# Altium PCB uMultimeter_ExpIO_Pcb.PcbDoc
Units mil, origin at the board's own origin, x right, y up, seen from the top; angles counter-clockwise.
Board outline 500 x 1200 mil, 2 copper layers (Top Layer, Bottom Layer); 5 components, 14 nets, 50 pads, 2 vias.
Unrouted connection lines stored in the file: 1.
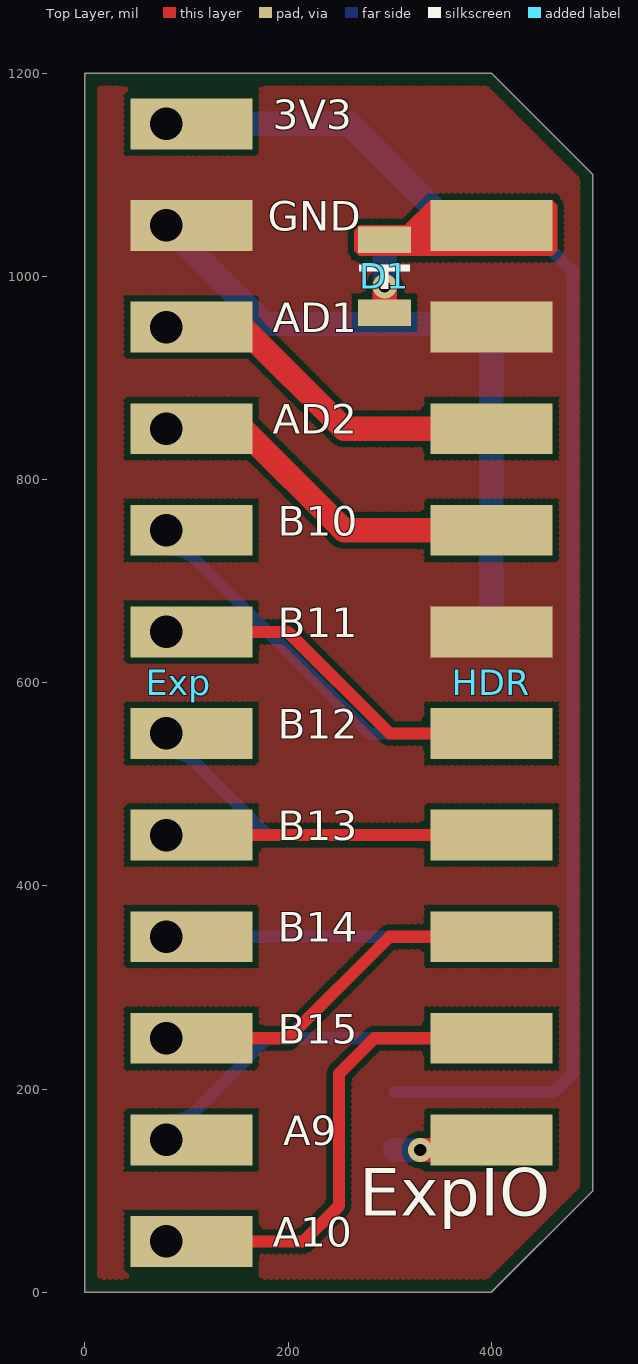
[diagram p0: Top Layer view]
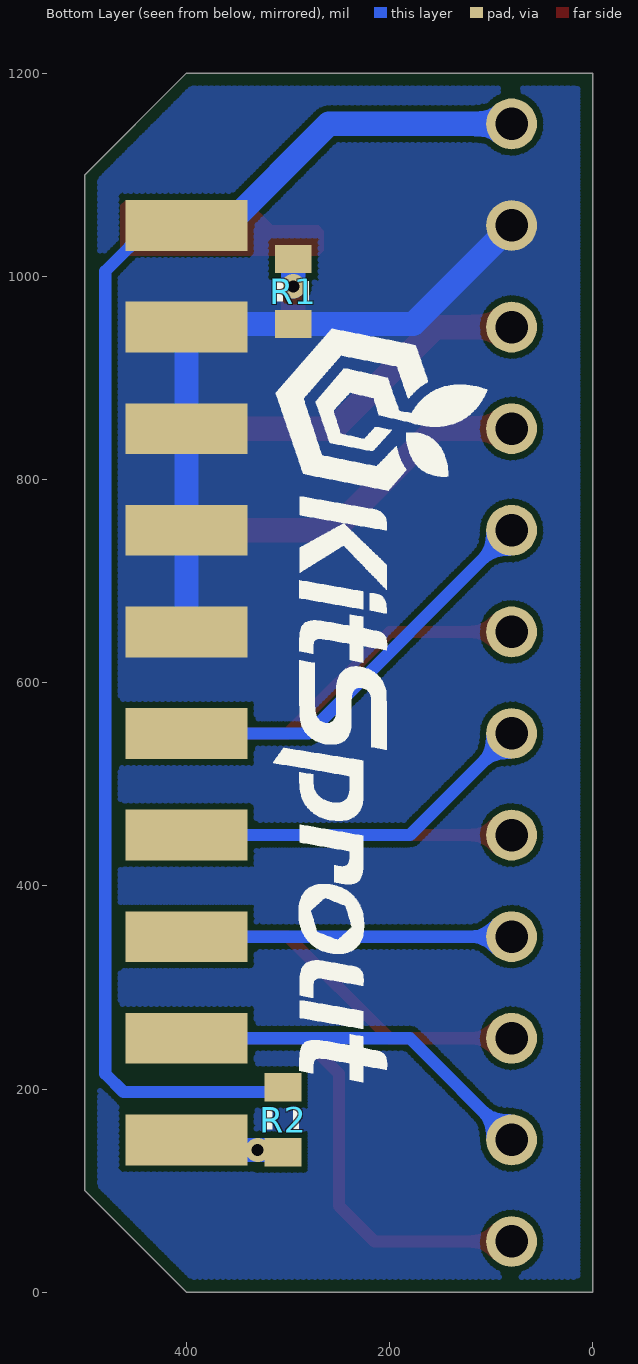
[diagram p1: Bottom Layer view, seen from below]
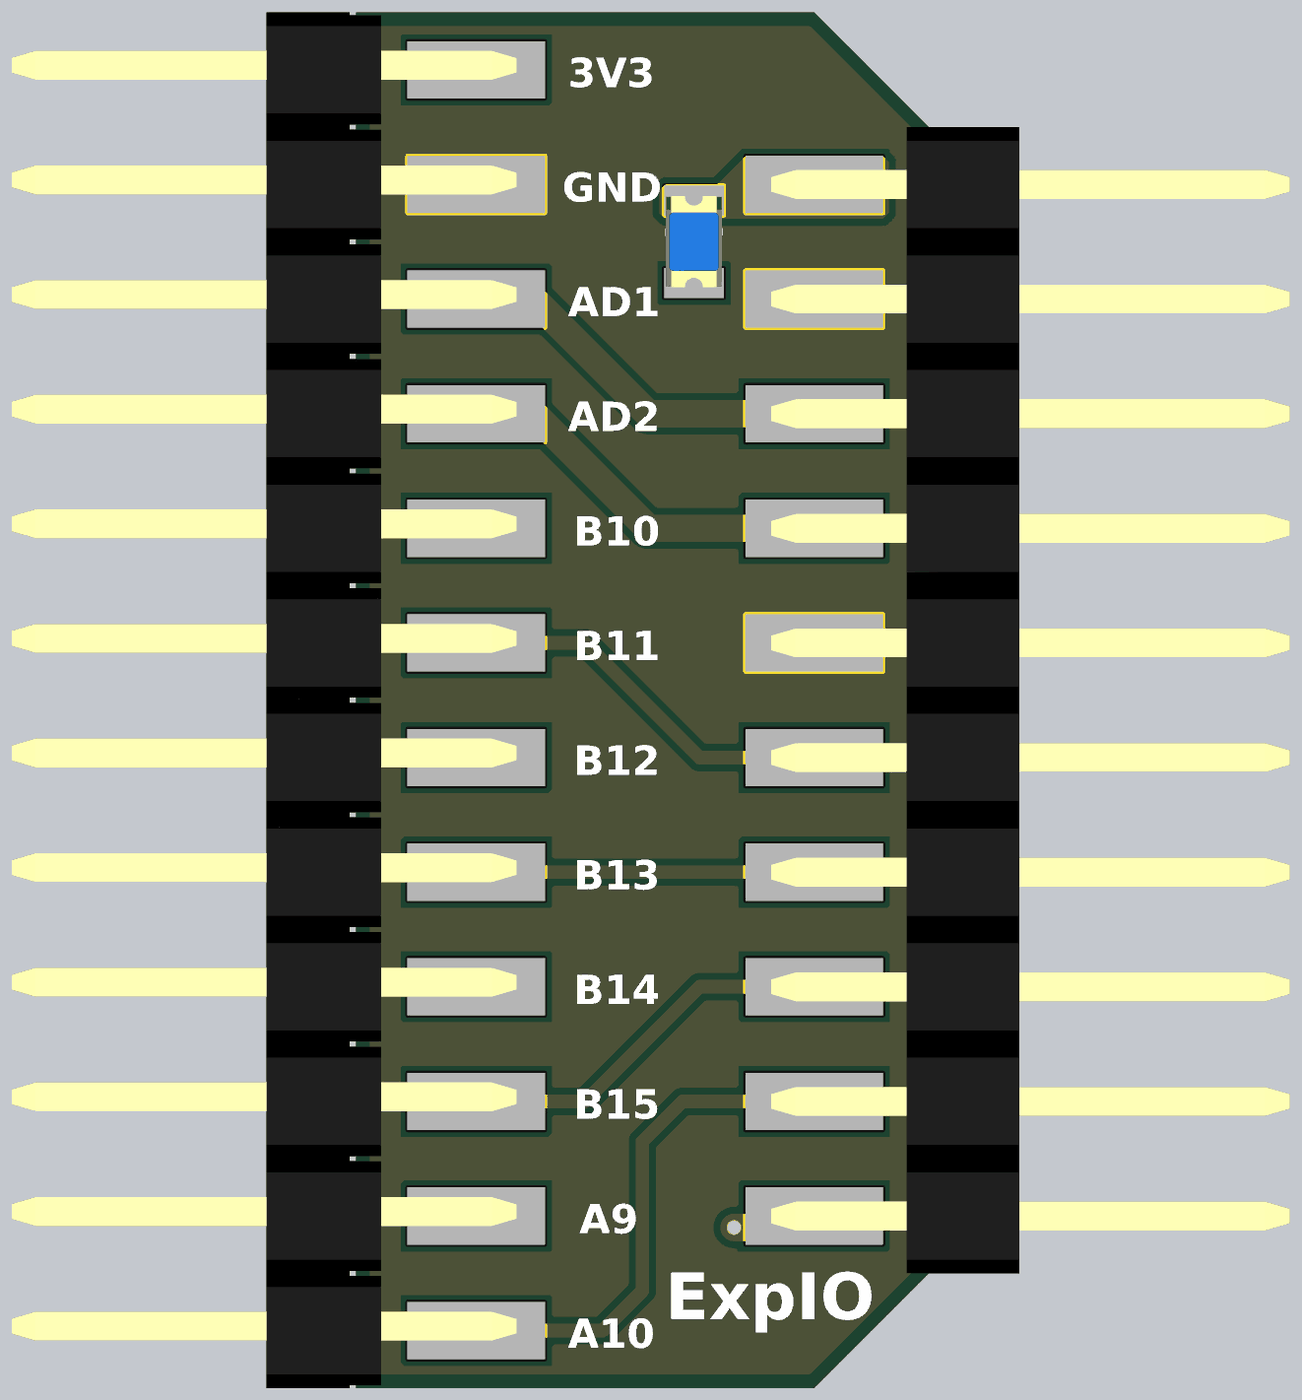
[diagram p2: 3D render of the assembled board from above, using the file's embedded part models]

## Layer stack, top to bottom
Top Solder: solder mask 0.4, Solder Resist, Dk 3.5
Top Layer: signal copper 1.4
Dielectric1: dielectric 12.6, FR-4, Dk 4.8
Bottom Layer: signal copper 1.4
Bottom Solder: solder mask 0.4, Solder Resist, Dk 3.5

## Board outline
0,0 0,1200 400,1200 500,1100 500,100 400,0

## Design rules (kind name [scope] priority, off if disabled: settings)
Clearance ClearancePolygon [InPolygon] p1: gap=6
Clearance [All] p2: gap=6
ComponentClearance [All] p1: gap=0 collisioncheckmode=3 verticalgap=0 showdistances=FALSE
Height [All] p1: minheight=0 maxheight=5000 prefheight=500
HoleSize [All] p1: absolutevalues=TRUE maxlimit=200 minlimit=1 maxpercent=80.000 minpercent=20.000
HoleToHoleClearance [All] p1: gap=6 allowstackedmicrovias=TRUE
MinimumSolderMaskSliver [All] p1: minsoldermaskwidth=4
PlaneConnect [All] p1: planeconnectstyle=Direct reliefexpansion=20 reliefentries=4 reliefconductorwidth=20 reliefairgap=10
PolygonConnect [All] p1: connectstyle=Direct reliefconductorwidth=20 reliefentries=4 polygonreliefangle="90 Angle" airgapwidth=10
RoutingVias [All] p1: holewidth=12 width=20 viastyle="Through Hole" minholewidth=12 minwidth=20 maxholewidth=100 maxwidth=200
SilkToSilkClearance [All] p1: silktosilkclearance=0
SilkToSolderMaskClearance SilkscreenOverComponentPads [IsPad] p1: minsilkscreentomaskgap=1 clearancetoexposedcopper=TRUE
SolderMaskExpansion [All] p1: expansion=2
Width [All] p1: maxlimit=64 minlimit=6 preferedwidth=10
22 further rules are at their usual default settings.

## Classes and differential pairs
component class EXP: HDR
component class uMultimeter_ExpIO_Sch: D1 Exp R1 R2

## Components (designator, comment, footprint, x,y, rotation, side; value= is the part's Value field where it differs from the comment)
D1 "LED_0805" LED_0805_BLUE 295,1000 r270 top
Exp "HDR1x12_2.54" HDR1X12_2.54_180H 105,50 r180 top
HDR "HDR2x10_2.54" HDR2X10_2.54_180H 400,1050 r0 top
R1 "Res_0603" RES_0603 295,985 r270 bottom
R2 "Res_0603" RES_0603 305,170 r270 bottom

## Footprints (in the part's own frame and the unit in brackets; to place one, negate y for a bottom-side part, rotate by r counter-clockwise, add the part's x,y. Pads: shape width x height; smd on the part's side, far side on the other; paste and mask are expansions set on the pad)
HDR1X12_2.54_180H [mil]
  rect 120x50 smd: 1(0,0) 2(0,-100) 3(0,-200) 4(0,-300) 5(0,-400) 6(0,-500) 7(0,-600) 8(0,-700) 9(0,-800) 10(0,-900) 11(0,-1000) 12(0,-1100)
  round 50 hole 32: 1(25,0) 2(25,-100) 3(25,-200) 4(25,-300) 5(25,-400) 6(25,-500) 7(25,-600) 8(25,-700) 9(25,-800) 10(25,-900) 11(25,-1000) 12(25,-1100)
  body extent -35,-1150 406,50, height 49
HDR2X10_2.54_180H [mil]
  rect 120x50 smd: 1(0,0) 3(0,-100) 5(0,-200) 7(0,-300) 9(0,-400) 11(0,-500) 13(0,-600) 15(0,-700) 17(0,-800) 19(0,-900)
  rect 120x50 smd far side: 2(0,0) 4(0,-100) 6(0,-200) 8(0,-300) 10(0,-400) 12(0,-500) 14(0,-600) 16(0,-700) 18(0,-800) 20(0,-900)
  body extent -38,-950 415,50, height 100
LED_0805_BLUE [mil]
  rect 26x52 smd: 1(-36,0) 2(36,0)
  silkscreen extent -12,-25 12,24, body extent -40,-25 40,25, height 43
RES_0603 [mil]
  rect 28x36 smd: 1(-32,0) 2(32,0)
  silkscreen extent -10,-16 10,16, body extent -31,-16 32,16, height 20

## Part data
D1: "LED"
Exp HDR: "Header"
R1 R2: "Resistor"

## Via types
v1: diameter 24, hole 12, Top Layer to Bottom Layer, 2 vias

## Nets (pads, with @x,y where several pads share a name; then routed paths per layer and width w, separated by ;. In a path a pad name is that pad's centre, name@x,y a point inside that pad or via, vN(x,y) a via of type N, cw(c..) or ccw(c..) an arc to the next point about the centre after c; other vN are vias at no path point)
3V3: D1.1 Exp.12 HDR.1 HDR.2 R2.1 | length 1432.5
  Bottom Layer w12: R2.1@305,197 462,197 480,215 480,1005 435,1050 HDR.2
  Bottom Layer w24: Exp.12@80,1150 260,1150 360,1050 HDR.2
EXP_01: Exp.8 HDR.12 | length 402.8
  Bottom Layer w12: Exp.8@80,750 280,550 HDR.12
EXP_02: Exp.7 HDR.11 | length 336.4
  Top Layer w12: Exp.7@105,650 200,650 300,550 HDR.11
EXP_03: Exp.6 HDR.14 | length 361.4
  Bottom Layer w12: Exp.6@80,550 180,450 HDR.14
EXP_04: Exp.5 HDR.13 | length 295
  Top Layer w12: Exp.5@105,450 HDR.13
EXP_05: Exp.4 HDR.16 | length 320
  Bottom Layer w12: Exp.4@80,350 HDR.16
EXP_06: Exp.3 HDR.15 | length 336.4
  Top Layer w12: Exp.3@105,250 200,250 300,350 HDR.15
EXP_07: Exp.2 HDR.18 | length 361.4
  Bottom Layer w12: Exp.2@80,150 180,250 HDR.18
EXP_08: Exp.1 HDR.17 | length 454
  Top Layer w12: Exp.1@105,50 215,50 250,85 250,215 285,250 HDR.17
EXP_ID1: HDR.19 HDR.20 R2.2 | length 169
  Top Layer w24: v1(330,140) HDR.19@390,140
  Bottom Layer w12: HDR.20@383,133 390,140 HDR.20
  Bottom Layer w24: R2.2@305,140 v1(330,140) HDR.20@390,140
GND: Exp.11 HDR.3 HDR.4 HDR.6 HDR.8 HDR.9 HDR.10 R1.2 | length 661.4
  Bottom Layer w24: Exp.11@80,1050 177,953 R1.2 397,953 HDR.4 HDR.6 HDR.8 HDR.10
NetD1_2: D1.2 R1.1 | length 53
  Top Layer w24: D1.2 v1(295,990)
  Bottom Layer w24: v1(295,990) R1.1
PROBE_CH1: Exp.10 HDR.5 | length 336.4
  Top Layer w24: Exp.10@105,950 155,950 255,850 HDR.5
PROBE_CH2: Exp.9 HDR.7 | length 336.4
  Top Layer w24: Exp.9@105,850 155,850 255,750 HDR.7

## Polygon pours and split planes (outlines as drawn)
GND on Bottom Layer "Bottom Layer-No Net" (hatched 45Degree grid 4 track 6, remove dead copper, pour order 4): 15,1185 395,1185 485,1095 485,105 395,15 15,15
GND on Top Layer "Bottom Layer-No Net" (hatched 45Degree grid 4 track 6, remove dead copper, pour order 3): 15,1185 395,1185 485,1095 485,105 395,15 15,15

## Other copper
Top Layer:
  region net 3V3: 465,1070 460,1075 340,1075 315,1050 270,1050 265,1045 265,1025 270,1020 460,1020 465,1025

## Silkscreen, mask and mechanical layers (free items; w line width, h text height)
Top Overlay:
  text "3V3" at 185,1135 h50
  text "GND" at 180,1035 h50
  text "AD1" at 185,935 h50
  text "AD2" at 185,835 h50
  text "B10" at 190,735 h50
  text "B11" at 190,635 h50
  text "B12" at 190,535 h50
  text "B13" at 190,435 h50
  text "B14" at 190,335 h50
  text "B15" at 190,235 h50
  text "A9" at 195,135 h50
  text "ExpIO" at 270,60 h80
  text "A10" at 185,35 h50
Bottom Overlay:
  drawing of 3510 lines, arcs and shapes, not listed
Mechanical 1:
  lines w2: 0,1200 0,0 400,0 500,100 500,1100 400,1200 0,1200 ; 0,1200 0,1200
Drill Drawing:
  text ".legend" at 605,25 h60